# Altium PCB board_back_PCB.PcbDoc
Units mm, origin at the board's own origin, x right, y up, seen from the top; angles counter-clockwise.
Board outline 152.4 x 101.6 mm, 2 copper layers (Top Layer, Bottom Layer); 8 components, 10 nets, 30 pads, 0 vias.
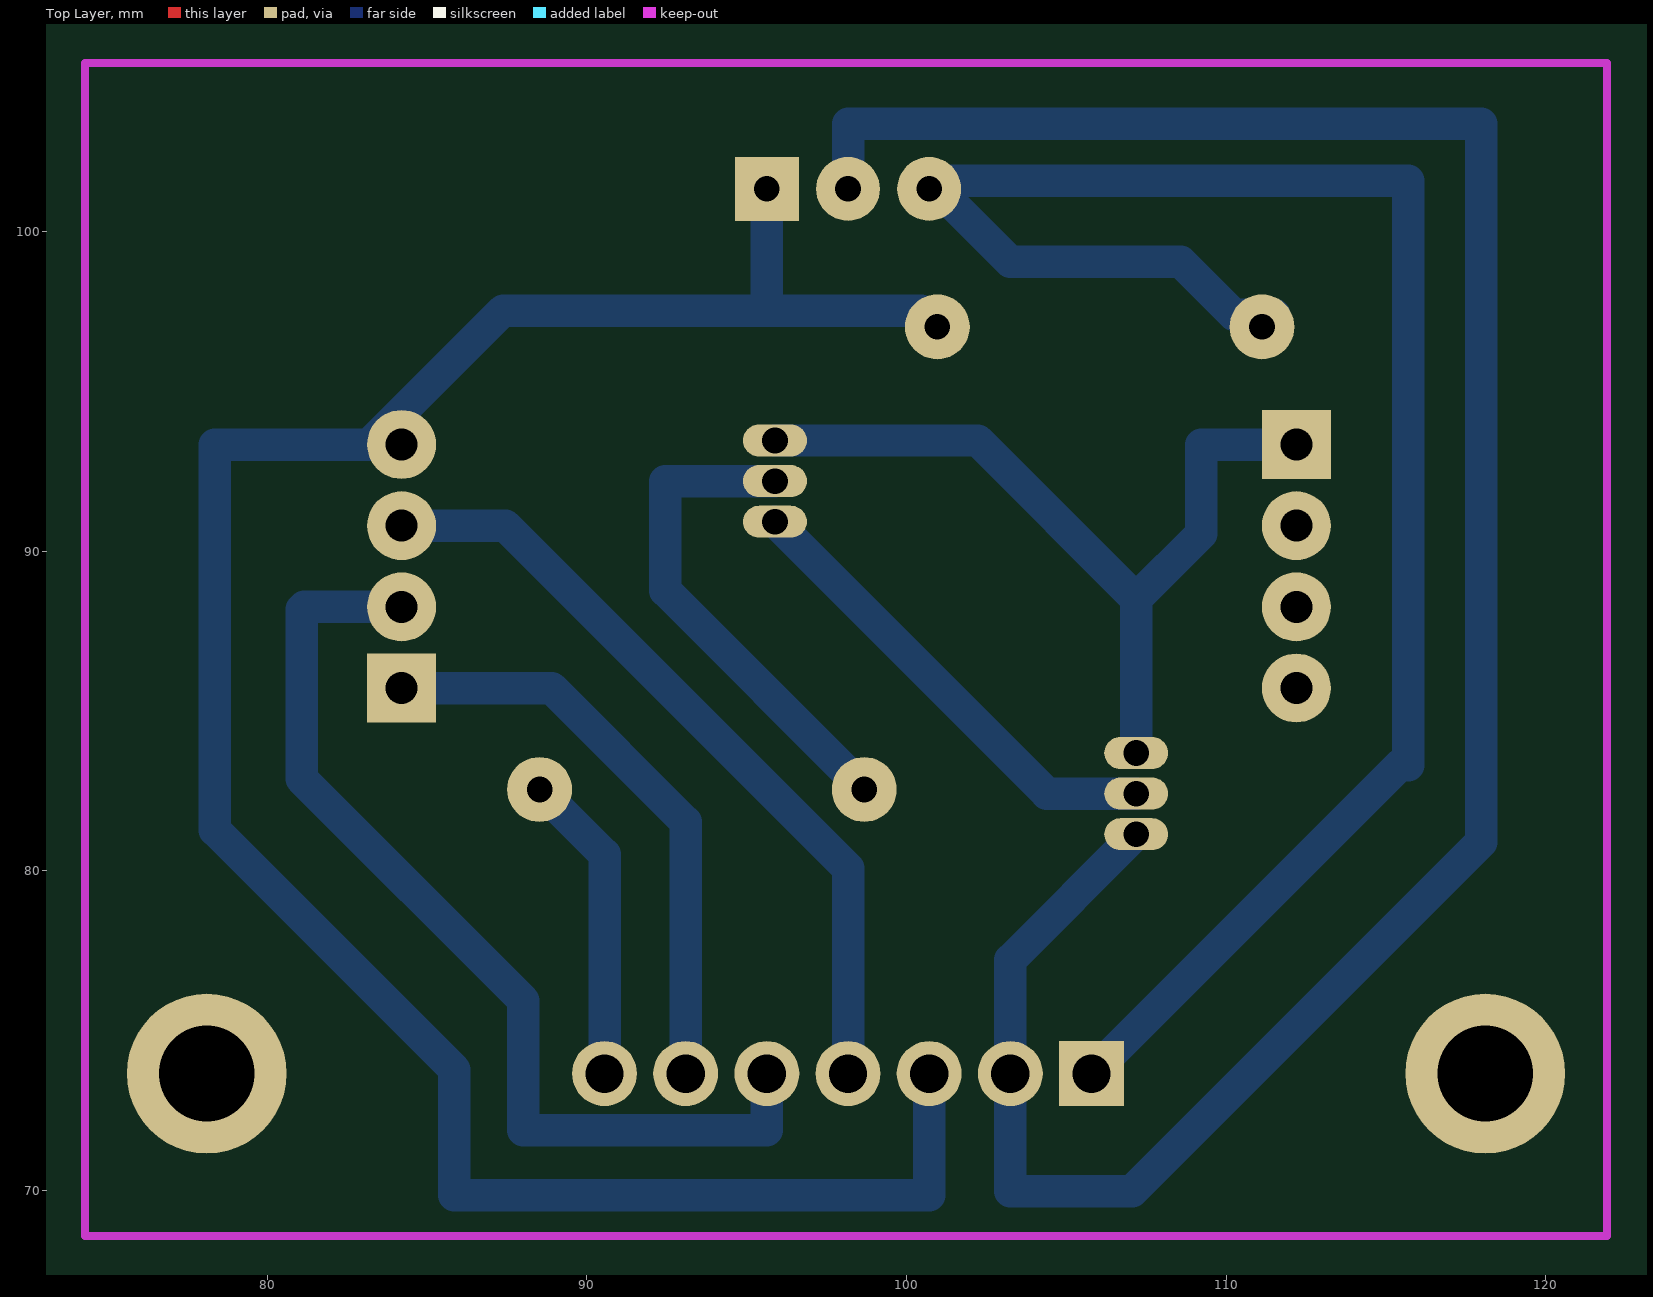
[diagram p0: Top Layer view]
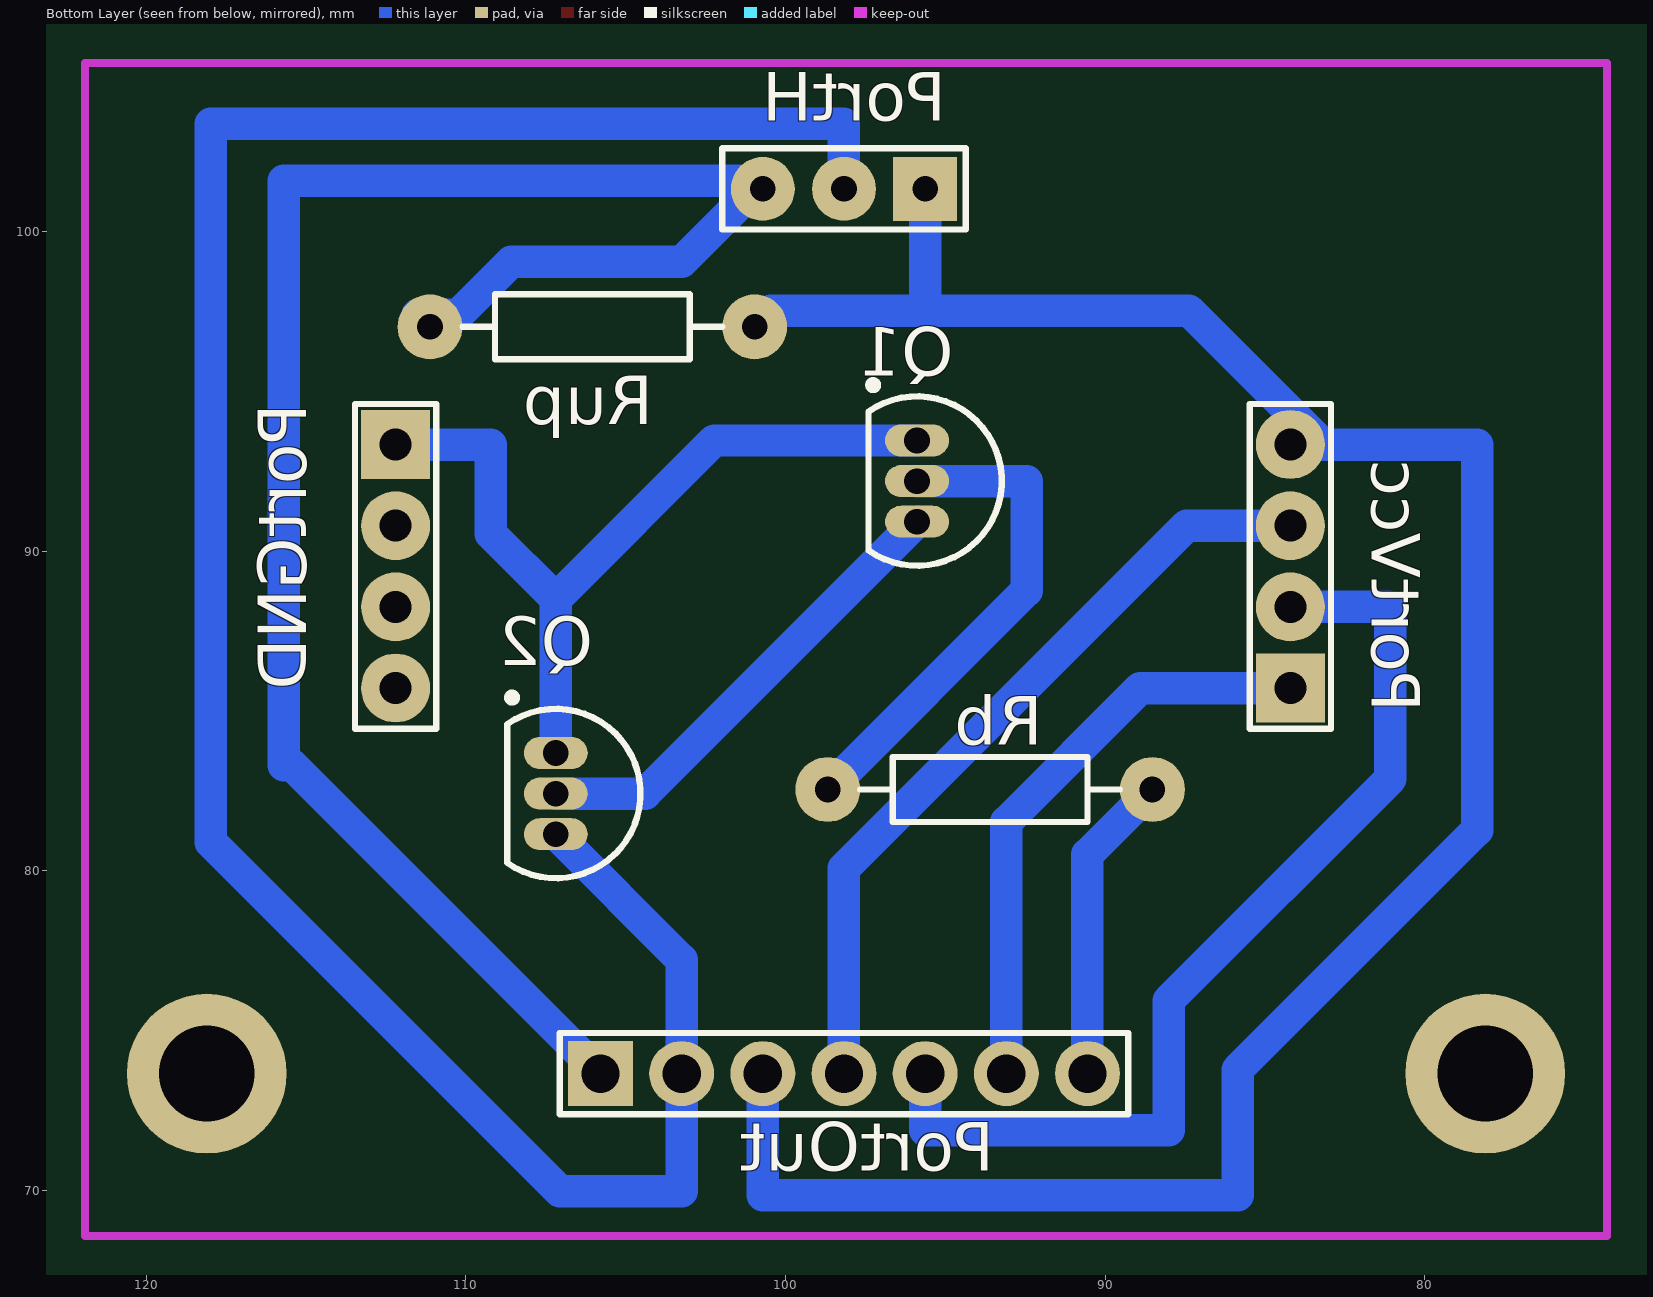
[diagram p1: Bottom Layer view, seen from below]

## Layer stack, top to bottom
Top Solder: solder mask 0.0102, Solder Resist, Dk 3.5
Top Layer: signal copper 0.0356
Dielectric 1: dielectric 0.32, FR-4, Dk 4.8
Bottom Layer: signal copper 0.0356
Bottom Solder: solder mask 0.0102, Solder Resist, Dk 3.5

## Board outline
25.4,25.4 177.8,25.4 177.8,127 25.4,127

## Design rules (kind name [scope] priority, off if disabled: settings)
Clearance [All] p1: gap=0.254 ignorepadtopadclearanceinfootprint=FALSE
PolygonConnect [All] p1: connectstyle=Relief reliefconductorwidth=0.254 reliefentries=4 polygonreliefangle="90 Angle" airgapwidth=0.254
RoomDefinition board_back [InComponentClass('board_back')] p1: confinementstyle=ConfineIn formatcopy=TRUE lockcomponents=FALSE outline 81.788,103.251 81.915,103.378 114.427,103.378 114.427,79.248 114.3,79.375 81.788,79.375 81.788,103.378 81.915,103.505
RoutingLayers [All] p1: top layer_v5=FALSE bottom layer_v5=TRUE
RoutingVias [All] p1: holewidth=0.711 width=1.27 viastyle="Through Hole" minholewidth=0.711 minwidth=1.27 maxholewidth=0.711 maxwidth=1.27
SolderMaskExpansion [All] p1: expansion=0.102
Width [All] p1: maxlimit=2.54 minlimit=0.254 preferedwidth=1.524 bottomlayer_prefwidth=1.016 minimp=50.000000 maximp=50.000000 favimp=50.000000
29 further rules are at their usual default settings.

## Components (designator, comment, footprint, x,y, rotation, side; value= is the part's Value field where it differs from the comment)
PortGND "Header 4" HDR1X4 112.201,93.345 r270 bottom
PortH "Header 3" HDR1X3 95.631,101.346 r0 bottom
PortOut "Header 7" HDR1X7 105.791,73.66 r180 bottom
PortVcc "Header 4" HDR1X4 84.201,85.725 r90 bottom
Q1 "NPN" TO-226-AA 95.885,92.202 r0 bottom
Q2 "NPN" TO-226-AA 107.188,82.423 r0 bottom
Rb "Res2" AXIAL-0.4 93.599,82.55 r0 bottom value=5.1K
Rup "Res2" AXIAL-0.4 106.045,97.028 r0 bottom value=5.1K

## Footprints (in the part's own frame and the unit in brackets; to place one, negate y for a bottom-side part, rotate by r counter-clockwise, add the part's x,y. Pads: shape width x height; smd on the part's side, far side on the other; paste and mask are expansions set on the pad)
AXIAL-0.4 [mil] "Axial Device, Thru-Hole; 2 Leads; 0.4 in Pin Spacing"
  round 80 hole 31.5: 1(-200,0) 2(200,0)
  silkscreen extent -160,-40 160,40
HDR1X3 [mm] "Connector; Header; 3 Position"
  rect 2x2 hole 0.8: 1(0,0)
  round 2 hole 0.8: 2(2.54,0) 3(5.08,0)
  silkscreen extent -1.27,-1.27 6.35,1.27
HDR1X4 [mil] "Connector; Header; 4 Position"
  rect 85x85 hole 39.37: 1(0,0)
  round 85 hole 39.37: 2(100,0) 3(200,0) 4(300,0)
  silkscreen extent -50,-50 350,50
HDR1X7 [mil] "Connector; Header; 7 Position"
  rect 80x80 hole 47.24: 1(0,0)
  round 80 hole 47.24: 2(100,0) 3(200,0) 4(300,0) 5(400,0) 6(500,0) 7(600,0)
  silkscreen extent -50,-50 650,50
TO-226-AA [mm] "TO, Flat Index; 3 In-Line, Axial Leads; Body Dia. 4.8mm; Leads 0.55 x 0.51 mm (max)"
  oval 2x1 hole 0.8: 1(0,-1.27) 2(0,0) 3(0,1.27)
  silkscreen extent -2.65,-3.13 1.52,2.65, body extent -2.65,-2.66 1.52,2.66, height 5.33

## Part data
PortGND PortVcc: "Header, 4-Pin", LatestRevisionDate=17-Jul-2002, LatestRevisionNote="Re-released for DXP Platform.", Publisher="Altium Limited"
PortH: "Header, 3-Pin", LatestRevisionDate=17-Jul-2002, LatestRevisionNote="Re-released for DXP Platform.", Publisher="Altium Limited"
PortOut: "Header, 7-Pin", LatestRevisionDate=17-Jul-2002, LatestRevisionNote="Re-released for DXP Platform.", Publisher="Altium Limited"
Q1 Q2: "NPN Bipolar Transistor", Code_JEDEC=TO-226-AA, LatestRevisionDate=17-Jul-2002, LatestRevisionNote="Re-released for DXP Platform.", PackageDescription="TO, Flat Index; 3 In-Line, Axial Leads; Body Dia. 4.8mm; Leads 0.55 x 0.51 mm (max)", PackageReference=TO-226-AA, Published=8-Jun-2000, Publisher="Altium Limited"
Rb Rup: "Resistor", LatestRevisionDate=17-Jul-2002, LatestRevisionNote="Re-released for DXP Platform.", PackageDescription="Axial Device, Thru-Hole; 2 Leads; 0.4 in Pin Spacing", PackageReference=AXIAL-0.4, Published=8-Jun-2000, Publisher="Altium Limited"

## Free pads (board coordinates)
  round 5 hole 3: 6(78.105,73.66) 7(118.11,73.66)

## Nets (pads, with @x,y where several pads share a name; then routed paths per layer and width w, separated by ;. In a path a pad name is that pad's centre, name@x,y a point inside that pad or via, vN(x,y) a via of type N, cw(c..) or ccw(c..) an arc to the next point about the centre after c; other vN are vias at no path point)
GND: PortH.2 PortOut.2 Q2.3 | length 76.4
  Bottom Layer w1.016: PortH.2 98.171,103.378 117.983,103.378 117.983,80.899 107.061,69.977 103.251,69.977 PortOut.2 103.251,77.216 Q2.3
NetPortGND_1: PortGND.1 Q1.1 Q2.1 | length 26.6
  Bottom Layer w1.016: Q1.1 102.235,93.472 107.188,88.519 ; Q2.1 107.188,88.519 ; PortGND.1@112.014,93.345 109.22,93.345 109.22,90.551 107.188,88.519
NetPortH_3: PortH.3 PortOut.1 Rup.2 | length 59.9
  Bottom Layer w1.016: PortOut.1 115.443,83.312 115.697,83.312 115.697,101.6 100.711,101.6 PortH.3 100.965,101.346 103.251,99.06 108.585,99.06 110.236,97.409 Rup.2@111.506,97.409
NetPortOut_4: PortOut.4 PortVcc.3 | length 24.8
  Bottom Layer w1.016: PortVcc.3 87.452,90.805 98.171,80.086 PortOut.4
NetPortOut_5: PortOut.5 PortVcc.2 | length 31.7
  Bottom Layer w1.016: PortVcc.2 81.153,88.265 81.077,88.189 81.077,82.88 88.011,75.946 88.011,71.882 95.631,71.882 PortOut.5
NetPortOut_6: PortOut.6 PortVcc.1 | length 18.5
  Bottom Layer w1.016: PortVcc.1 88.9,85.725 93.091,81.534 PortOut.6
NetPortOut_7: PortOut.7 Rb.1 | length 9.7
  Bottom Layer w1.016: Rb.1 90.551,80.518 PortOut.7
NetQ1_2: Q1.2 Rb.2 | length 15.7
  Bottom Layer w1.016: Q1.2 92.456,92.202 92.456,88.773 Rb.2
NetQ1_3: Q1.3 Q2.2 | length 14.8
  Bottom Layer w1.016: Q1.3 104.394,82.423 Q2.2
VCC: PortH.1 PortOut.3 PortVcc.4 Rup.1 | length 73.6
  Bottom Layer w1.016: PortH.1 95.631,97.536 ; PortOut.3 100.711,69.85 85.852,69.85 85.852,73.787 78.359,81.28 78.359,93.345 83.185,93.345 87.376,97.536 95.631,97.536 ; Rup.1 100.457,97.536 95.631,97.536
pads on no net: PortGND.2 PortGND.3 PortGND.4

## Keep-outs
Keep-Out Layer:
  lines w0.254: 74.295,68.58 74.295,105.283 121.92,105.283 121.92,68.58 74.295,68.58